# EAGLE board bird_beaks 2.0 (EAGLE 9.6.2)
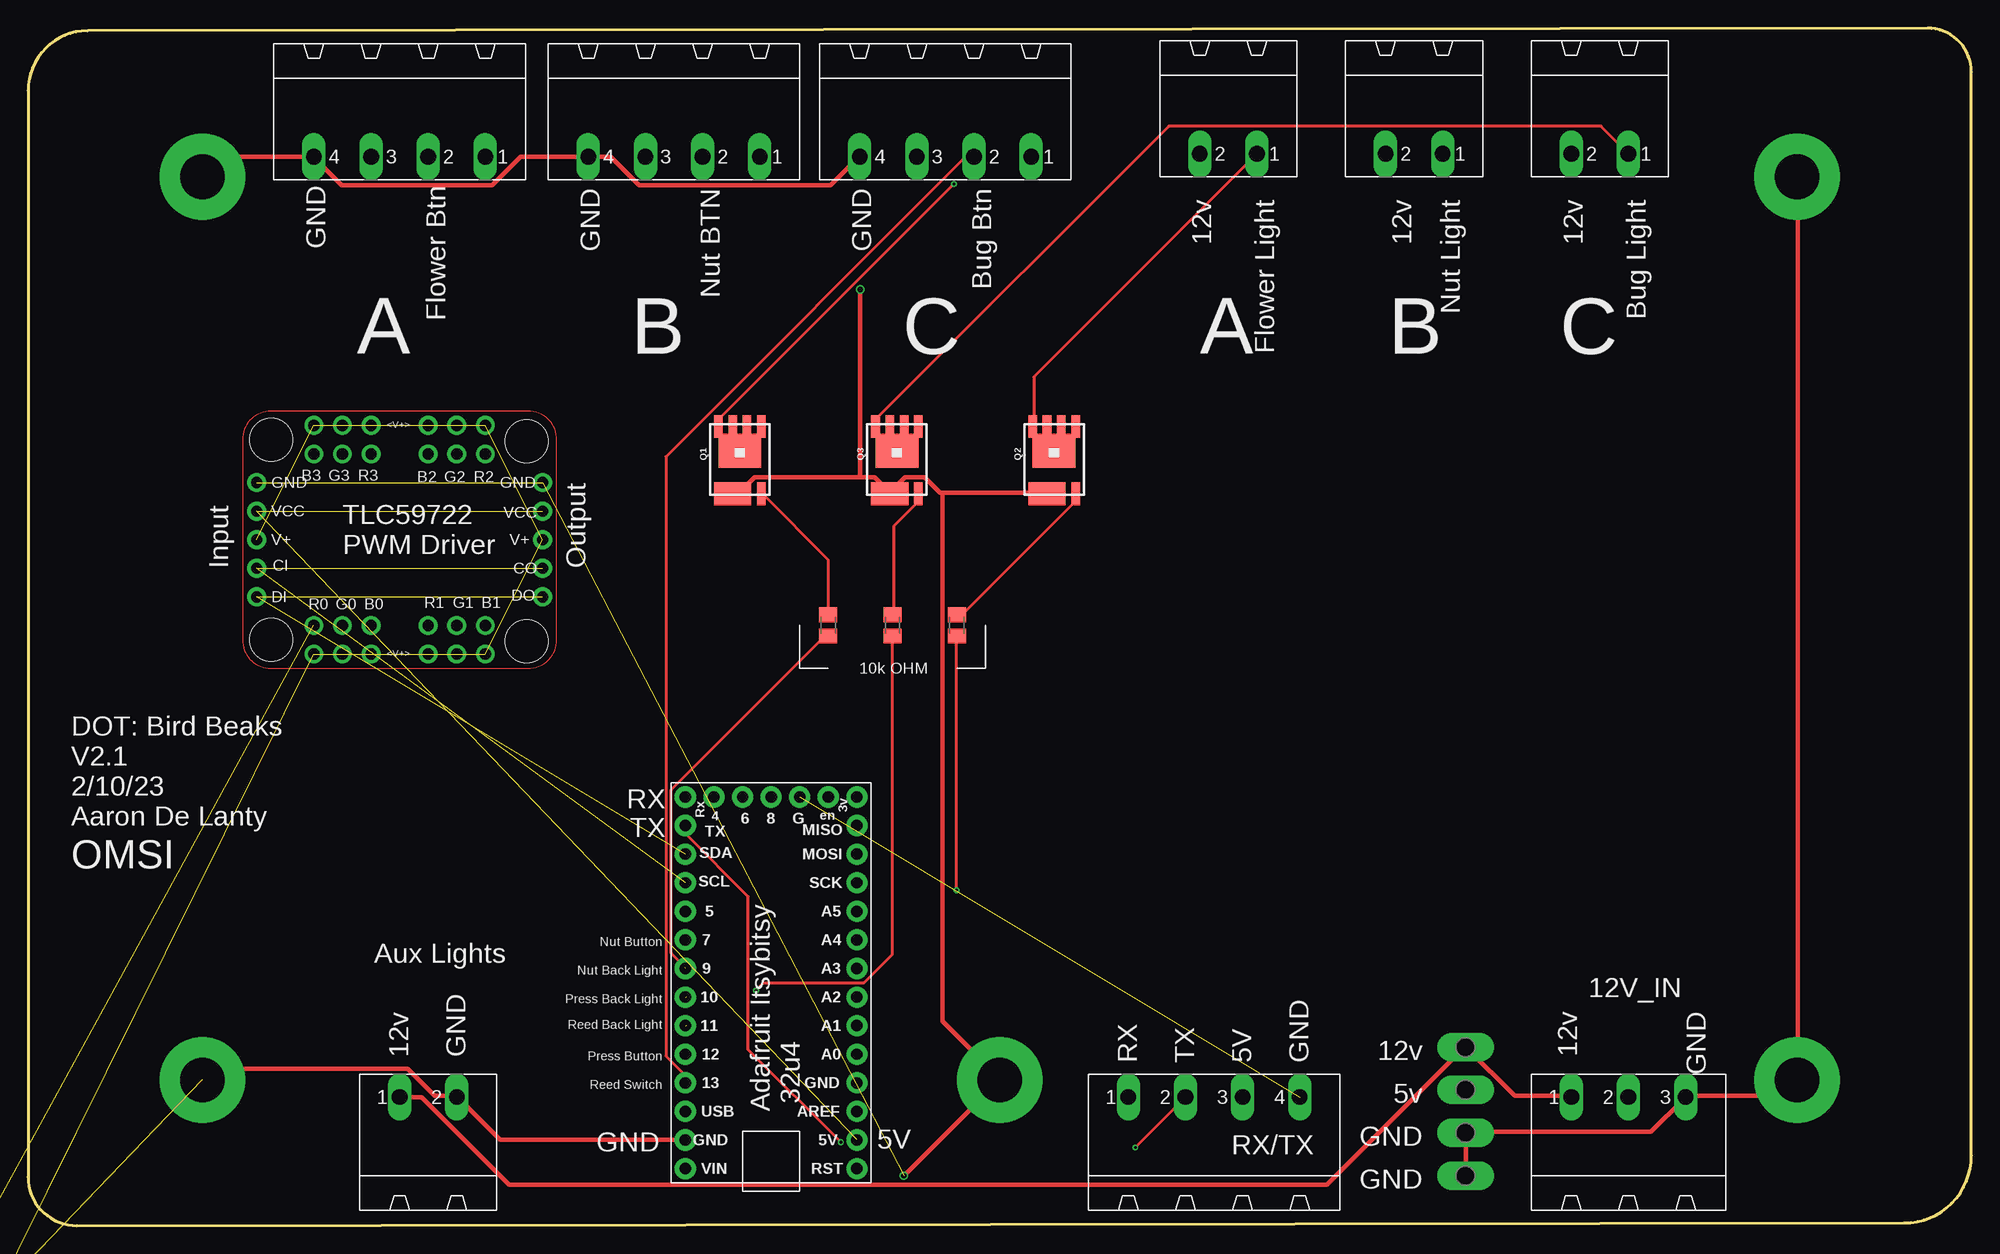
[diagram p0: board, top side]
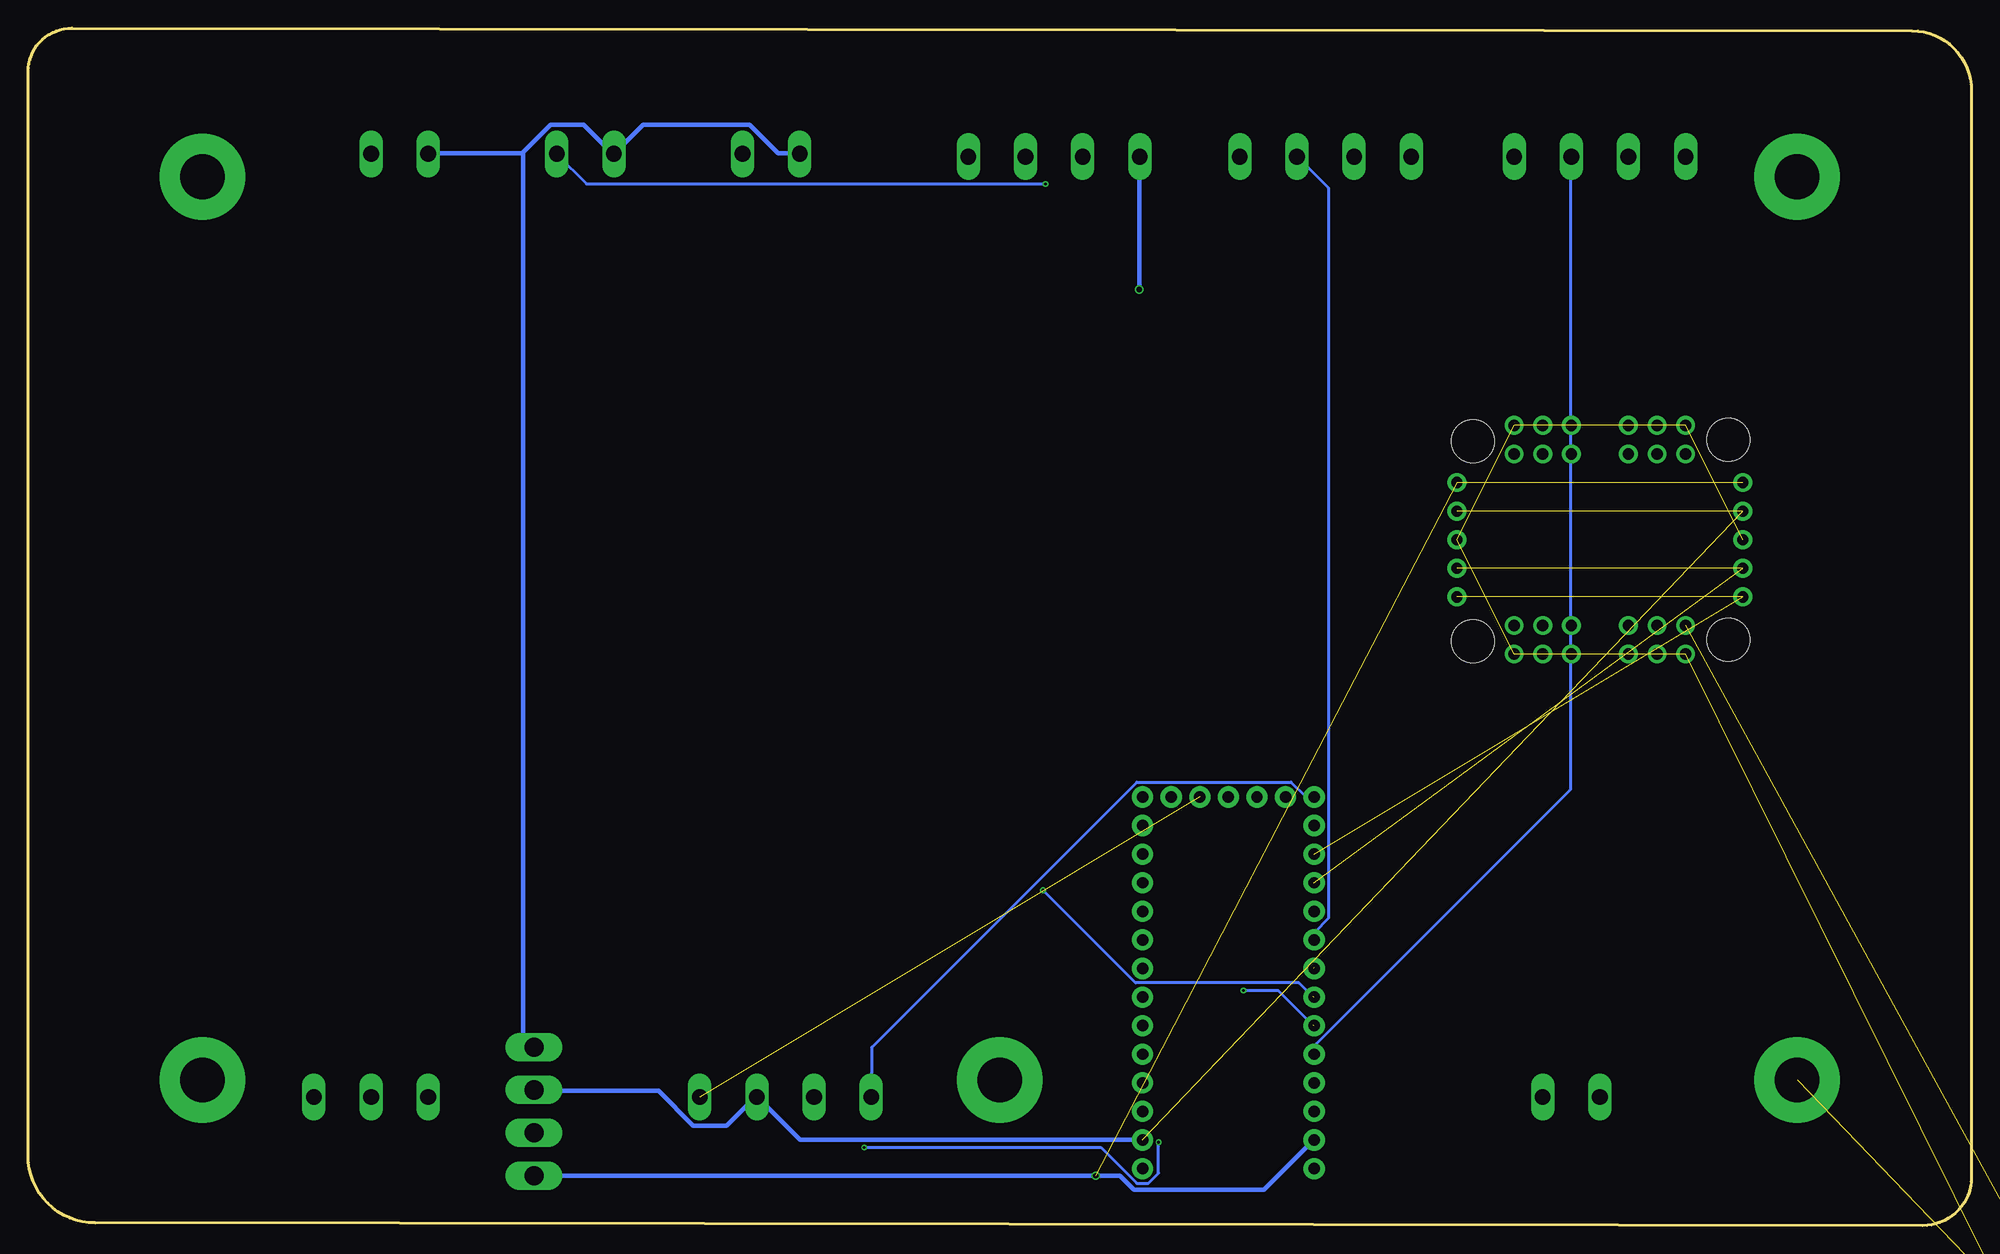
[diagram p1: board, bottom side, seen from below]

Size 172.72 x 106.41 mm. Coordinates in mm from the lower left corner, seen from the top.
Outline: 168.83,106.41 5.28,106.17 arc90 0,100.89 0,4.33 arc90 4.33,0 166.75,0.24 arc90 172.72,6.22 172.72,102.53 arc90 168.83,106.41
Copper layers (1*16): Top 0.035559375mm / dielectric 1.6mm / Bottom 0.035559375mm
Design rules "oshpark-2layer (1) *": minimum track width 10mil, minimum drill 10mil, track to track 8mil, track to pad 8mil, pad to pad 8mil, via to via 8mil, smd to smd 8mil, copper to edge 15mil, drill to drill 6mil, minimum pad ring 5mil, minimum via ring 5mil, stop-mask expansion 2.5mil, vias tented up to drill 25mil, thermal gap 10mil
Net classes: 1 High Power: width 0.406 mm, drill 0.483 mm

## Footprints (pad centres in the part's own frame; a part is rotated, then mirrored left to right if it is on the bottom)
M0805 = smd 1.3 x 1.6: 1 -0.95,0; 2 0.95,0
MSTBA3 = drill 1.397 long: 1 -5.08,5.08; 2 0,5.08; 3 5.08,5.08
SO-8_POWER_PAK = smd 0.762 x 2.032: D1 -3.423,2.437; D2 -2.153,2.437; D3 -0.883,2.437; D4 0.387,2.437; G 0.387,-3.532 | smd 3.81 x 3.048: D5 -1.518,0.278 | smd 3.302 x 2.032: S -2.153,-3.532
MSTBA4 = drill 1.397 long: 1 -7.62,5.08; 2 -2.54,5.08; 3 2.54,5.08; 4 7.62,5.08
STANDOFF_ELECTRICAL_5_32 = drill 3.969 pad 7.62: P1 0,0
P2-38-17 = drill 1.702 pad 2.121 long: TP-1 -1.905,0; TP-2 1.905,0
ADAFRUIT_LENOARDO = drill 1.016 pad 1.88: 3V -10.16,-21.59; 5V -10.16,8.89; A0 -10.16,1.27; A1 -10.16,-1.27; A2 -10.16,-3.81; A3 -10.16,-6.35; A4 -10.16,-8.89; A5 -10.16,-11.43; AREF -10.16,6.35; D4 2.54,-21.59; D5 5.08,-11.43; D6 0,-21.59; D7 5.08,-8.89; D8 -2.54,-21.59; D9 5.08,-6.35; D10 5.08,-3.81; D11 5.08,-1.27; D12 5.08,1.27; D13 5.08,3.81; EN -7.62,-21.59; GND@0 -10.16,3.81; GND@1 -5.08,-21.59; GND@2 5.08,8.89; MISO -10.16,-19.05; MOSI -10.16,-16.51; RES -10.16,11.43; RX 5.08,-21.59; SCK -10.16,-13.97; SCL 5.08,-13.97; SDA 5.08,-16.51; TX 5.08,-19.05; USB 5.08,6.35; VIN 5.08,11.43
ADAFRUIT_TLC59711 = drill 1 pad 1.676: B0 -2.54,-5.08; B1 7.62,-5.08; B2 2.54,10.16; B3 -7.62,10.16; CI -12.7,0; CO 12.7,0; DI -12.7,-2.54; DO 12.7,-2.54; G0 -5.08,-5.08; G1 5.08,-5.08; G2 5.08,10.16; G3 -5.08,10.16; P$1 -12.7,7.62; P$2 -12.7,5.08; P$3 -12.7,2.54; P$9 -2.54,-7.62; P$10 -5.08,-7.62; P$11 -7.62,-7.62; P$15 7.62,-7.62; P$16 5.08,-7.62; P$17 2.54,-7.62; P$20 12.7,2.54; P$21 12.7,5.08; P$22 12.7,7.62; P$24 7.62,12.7; P$25 5.08,12.7; P$28 2.54,12.7; P$29 -2.54,12.7; P$32 -5.08,12.7; P$33 -7.62,12.7; R0 -7.62,-5.08; R1 2.54,-5.08; R2 7.62,10.16; R3 -2.54,10.16 | hole 3.81: -11.43,11.43; -11.43,-6.35; 11.303,-6.477; 11.303,11.303
MSTBA2 = drill 1.397 long: 1 -2.54,5.08; 2 2.54,5.08

## Placement (x,y rotation side)
10K  [M0805]  71.12,53.33 270 top
10K1  [M0805]  82.55,53.33 270 top
10K2  [M0805]  76.84,53.33 270 top
10K3  [M0805]  -36.83,-26.68 270 top  (outside the outline)
10K4  [M0805]  -20.32,-26.68 0 top  (outside the outline)
10K5  [M0805]  -20.32,-39.38 0 top  (outside the outline)
10K6  [M0805]  -11.43,-52.08 0 top  (outside the outline)
10K7  [M0805]  -20.32,-60.97 0 top  (outside the outline)
10K8  [M0805]  -13.97,-60.97 0 top  (outside the outline)
10K9  [M0805]  -12.7,-82.56 0 top  (outside the outline)
10K10  [M0805]  -11.43,-73.67 0 top  (outside the outline)
10K11  [M0805]  -20.32,-82.56 0 top  (outside the outline)
12V_IN  MSTBA3  [MSTBA3]  142.24,6.34 0 top
Q1  MOSFET-NCH  [SO-8_POWER_PAK]  64.77,68.57 0 top
Q2  MOSFET-NCH  [SO-8_POWER_PAK]  92.71,68.57 0 top
Q3  MOSFET-NCH  [SO-8_POWER_PAK]  78.74,68.57 0 top
Q4  MOSFET-NCH  [SO-8_POWER_PAK]  -33.02,-17.79 0 top  (outside the outline)
Q5  MOSFET-NCH  [SO-8_POWER_PAK]  -16.51,-19.06 0 top  (outside the outline)
Q6  MOSFET-NCH  [SO-8_POWER_PAK]  -16.51,-31.76 0 top  (outside the outline)
Q7  MOSFET-NCH  [SO-8_POWER_PAK]  -16.51,-44.46 0 top  (outside the outline)
Q8  MOSFET-NCH  [SO-8_POWER_PAK]  -8.89,-44.46 0 top  (outside the outline)
Q9  MOSFET-NCH  [SO-8_POWER_PAK]  -16.51,-53.35 0 top  (outside the outline)
Q10  MOSFET-NCH  [SO-8_POWER_PAK]  -16.51,-66.05 0 top  (outside the outline)
Q11  MOSFET-NCH  [SO-8_POWER_PAK]  -8.89,-66.05 0 top  (outside the outline)
Q12  MOSFET-NCH  [SO-8_POWER_PAK]  -16.51,-74.94 0 top  (outside the outline)
RX/TX  MSTBA4  [MSTBA4]  105.41,6.34 0 top
S1  STANDOFF_ELECTRICAL5-32  [STANDOFF_ELECTRICAL_5_32]  15.49,93.21 0 top
S3  STANDOFF_ELECTRICAL5-32  [STANDOFF_ELECTRICAL_5_32]  157.23,12.95 0 top
S4  STANDOFF_ELECTRICAL5-32  [STANDOFF_ELECTRICAL_5_32]  157.23,93.21 0 top
S6  STANDOFF_ELECTRICAL5-32  [STANDOFF_ELECTRICAL_5_32]  86.36,12.95 0 top
S8  STANDOFF_ELECTRICAL5-32  [STANDOFF_ELECTRICAL_5_32]  15.49,12.95 0 top
TP1  PTR2  [P2-38-17]  127.76,6.34 90 top
TP2  PTR2  [P2-38-17]  127.76,13.96 90 top
U1  ITSYBITSY_5V  [ADAFRUIT_LENOARDO]  63.5,16.5 180 top
U$1  TLC59711  [ADAFRUIT_TLC59711]  33.02,58.41 0 top
X1  MSTBA4  [MSTBA4]  57.4,100.07 180 top
X2  MSTBA4  [MSTBA4]  33.02,100.07 180 top
X3  MSTBA4  [MSTBA4]  81.53,100.07 180 top
X4  MSTBA2  [MSTBA2]  35.56,6.34 0 top
X5  MSTBA2  [MSTBA2]  123.19,100.32 180 top
X6  MSTBA2  [MSTBA2]  106.68,100.32 180 top
X7  MSTBA2  [MSTBA2]  139.7,100.32 180 top

## Library data of the parts
10K 10K1-10K11 = adafruit
12V_IN = con-phoenix-508; MF: FARNELL; MPN: 1757255; OC_FARNELL: 3705183; OC_NEWARK: 71C4162
Q1-Q12 U1 = th_ds_libraries
RX/TX = th_libraries; MF: FARNELL; MPN: 1757268; OC_FARNELL: 3705195; OC_NEWARK: 71C4163
S1 S3 S4 S6 S8 = th_libraries
TP1 TP2 = testpad
U$1 = OMSI_Default_V1
X1-X3 = con-phoenix-508; MF: FARNELL; MPN: 1757268; OC_FARNELL: 3705195; OC_NEWARK: 71C4163
X4-X7 = con-phoenix-508; MF: FARNELL; MPN: 1757242; OC_FARNELL: 3705171; OC_NEWARK: 71C4161

## Nets
5V [High Power]: RX/TX.3 TP2.TP-1 U1.5V U$1.P$2 U$1.P$21
12V [High Power]: 12V_IN.1 TP2.TP-2 X4.1 X5.2 X6.2 X7.2
BUG_LIGHT: Q3.D1 X7.1
D1: 10K3.2
D2: 10K4.2
D4: 10K6.2
D5: 10K7.2
D6: 10K8.2
D7: U1.D7 X1.2
D8: 10K9.2
D9: 10K.2 U1.D9
D10: 10K1.2 U1.D10
D11: 10K2.2 U1.D11
D12: U1.D12 X2.2
D13: U1.D13 X3.2
D14: 10K10.2
D15: 10K11.2
FLOWER_LIGHT: Q2.D1 X6.1
GND [High Power]: 12V_IN.3 Q1.S Q2.S Q3.S Q4.S Q5.S Q6.S Q7.S Q8.S Q9.S Q10.S Q11.S Q12.S S1.P1 S3.P1 S4.P1 S6.P1 S8.P1 TP1.TP-1 TP1.TP-2 U1.GND@2 U$1.P$1 U$1.P$22 X1.4 X2.4 X3.4 X4.2
N$1: 10K2.1 Q3.G
N$2: 10K.1 Q1.G
N$3: RX/TX.4 U1.GND@1
N$4: 10K3.1 Q4.G
N$5: Q4.D1
N$6: 10K4.1 Q5.G
N$7: 10K1.1 Q2.G
N$8: RX/TX.2 U1.TX
N$9: Q5.D1
N$11: RX/TX.1 U1.RX
N$12: 10K5.1 Q6.G
N$13: Q6.D1 U$1.R0
N$14: 10K6.1 Q7.G
N$15: Q7.D1
N$16: 10K7.1 Q8.G
N$17: Q8.D1
N$18: 10K8.1 Q9.G
N$19: Q9.D1
N$20: 10K9.1 Q10.G
N$21: Q10.D1
N$22: 10K10.1 Q11.G
N$23: Q11.D1
N$24: 10K11.1 Q12.G
N$25: Q12.D1
NUT_LIGHT: Q1.D1 X5.1
SCL: U1.SCL U$1.CI U$1.CO
SDA: U1.SDA U$1.DI U$1.DO
V+: 10K5.2 U$1.P$3 U$1.P$9 U$1.P$10 U$1.P$11 U$1.P$15 U$1.P$16 U$1.P$17 U$1.P$20 U$1.P$24 U$1.P$25 U$1.P$28 U$1.P$29 U$1.P$32 U$1.P$33

## Tracks (layer width: path | path; a pad name or v marks a point on that pad's centre or on a via)
5V  (2 unrouted)
  Bottom 0.406: U1.5V 73.72,7.64 104.13,7.64 107.9,11.41 RX/TX.3 108.13,11.41 110.64,8.9 113.61,8.9 116.7,11.98 127.67,11.98 TP2.TP-1
12V
  Top 0.406: X4.1 33.03,11.41 34.98,11.41 42.75,3.64 115.44,3.64 127.67,15.87 TP2.TP-2 127.9,15.75 132.13,11.53 137.16,11.53 12V_IN.1
  Bottom 0.406: X6.2 104.24,95.31 106.07,95.31 108.59,97.82 118.07,97.82 X5.2 120.81,95.31 123.33,97.82 126.3,97.82 128.82,95.31 | 128.82,95.31 137.16,95.31 X7.2 | 128.82,95.31 128.7,95.19 128.7,16.78 127.79,15.87 TP2.TP-2
BUG_LIGHT
  Top 0.254: Q3.D1 75.32,71.08 75.32,71.65 101.38,97.71 139.79,97.71 142.19,95.31 X7.1
D7
  Bottom 0.254: U1.D7 58.41,25.47 58.41,26.04 57.15,27.3 57.15,92.22 59.89,94.96 X1.2
D9  (1 unrouted)
  Top 0.254: 58.41,22.96 57.15,24.21 57.15,38.73 70.75,52.33 71.09,52.33 10K.2
D10  (via drill 0.25)  (1 unrouted)
  Top 0.254: v82.53,29.81 82.53,52.33 10K1.2
  Bottom 0.254: v82.53,29.81 74.3,21.58 59.78,21.58 58.52,20.33
D11  (via drill 0.25)  (1 unrouted)
  Top 0.254: v64.69,20.9 65.38,21.58 74.3,21.58 76.81,24.1 76.81,52.33 10K2.2
  Bottom 0.254: v64.69,20.9 61.61,20.9 58.52,17.81
D12
  Bottom 0.254: U1.D12 58.41,15.3 58.41,15.98 35.66,38.73 35.66,94.96 X2.2
D13
  Top 0.254: U1.D13 58.41,12.78 58.41,13.35 56.69,15.07 56.69,68.33 83.32,94.96 84.01,94.96 X3.2
FLOWER_LIGHT
  Top 0.254: Q2.D1 89.38,71.08 89.38,75.42 109.16,95.19 X6.1
GND  (via drill 0.48)  (11 unrouted)
  Top 0.406: 73.95,66.5 75.21,66.5 76.58,65.13 Q3.S 76.69,65.25 77.95,66.5 79.67,66.5 81.04,65.13 81.27,65.13 | 73.95,66.5 64.58,66.5 63.21,65.13 62.64,65.13 Q1.S | 81.27,65.13 90.53,65.13 Q2.S | X3.4 73.84,94.96 71.32,92.45 54.29,92.45 51.78,94.96 49.84,94.96 X1.4 49.61,94.96 43.78,94.96 41.26,92.45 27.89,92.45 25.49,94.85 X2.4 25.38,94.96 17.26,94.96 15.54,93.25 S1.P1 | v73.95,83.19 73.95,66.5 | U1.GND@2 58.41,7.64 41.95,7.64 38.18,11.41 X4.2 37.95,11.53 36.12,11.53 33.72,13.93 16.46,13.93 15.54,13.01 S8.P1 | v77.84,4.44 86.3,12.9 S6.P1 86.3,13.13 81.27,18.15 81.27,65.13 | TP1.TP-1 127.79,4.44 127.79,8.21 TP1.TP-2 127.9,8.32 144.25,8.32 147.22,11.3 12V_IN.3 147.33,11.53 155.79,11.53 157.16,12.9 S3.P1 157.28,13.13 157.28,93.14 S4.P1
  Bottom 0.406: v73.95,83.19 73.95,94.96 X3.4 | U1.GND@2 58.52,7.52 62.87,3.18 74.41,3.18 75.67,4.44 v77.84,4.44 TP1.TP-1
N$1
  Top 0.254: 10K2.1 76.92,54.39 76.92,62.16 79.1,64.33 79.1,65.02 Q3.G
N$2
  Top 0.254: 10K.1 71.09,54.39 71.09,59.19 65.27,65.02 Q1.G
N$3  (1 unrouted)
N$4  (1 unrouted)
N$6  (1 unrouted)
N$7
  Top 0.254: 10K1.1 82.64,54.39 83.1,54.39 93.04,64.33 93.04,65.02 Q2.G
N$8  (via drill 0.25)
  Top 0.254: v72.24,7.41 64.01,15.64 64.01,29.24 58.52,34.73 58.52,35.53 U1.TX | v98.41,6.95 102.87,11.41 RX/TX.2
  Bottom 0.254: v72.24,7.41 72.24,4.67 73.15,3.75 74.18,3.75 77.38,6.95 v98.41,6.95
N$11
  Bottom 0.254: U1.RX 58.52,38.16 59.21,38.16 60.46,39.41 74.18,39.41 97.73,15.87 97.73,11.53 RX/TX.1
N$12  (1 unrouted)
N$13  (1 unrouted)
N$14  (1 unrouted)
N$16  (1 unrouted)
N$18  (1 unrouted)
N$20  (1 unrouted)
N$22  (1 unrouted)
N$24  (1 unrouted)
NUT_LIGHT  (via drill 0.25)
  Top 0.254: v82.3,92.56 61.38,71.65 61.38,71.08 Q1.D1
  Bottom 0.254: v82.3,92.56 123.1,92.56 125.73,95.19 X5.1
SCL  (2 unrouted)
SDA  (2 unrouted)
V+  (14 unrouted)

## Text on the board
tPlace: Adafruit Itsybitsy / 32u4
tNames: GND | Flower Btn | GND | Nut BTN | GND | Bug Btn | 12v | Flower Light | 12v | Nut Light | 12v | Bug Light | A | B | C | A | B | C | 10k OHM | RX | TX | DOT: Bird Beaks / V2.1 / 2/10/23 / Aaron De Lanty | OMSI | Nut Button | Aux Lights | Nut Back Light | Press Back Light | Reed Back Light | 12v | GND | 12v | Press Button | 12v | GND | RX | TX | 5V | GND | Reed Switch | 5v | GND | GND | 5V | GND